# EAGLE board VentaConnected_Arduino_V0.01_2017-10-27 (EAGLE 8.3.2)
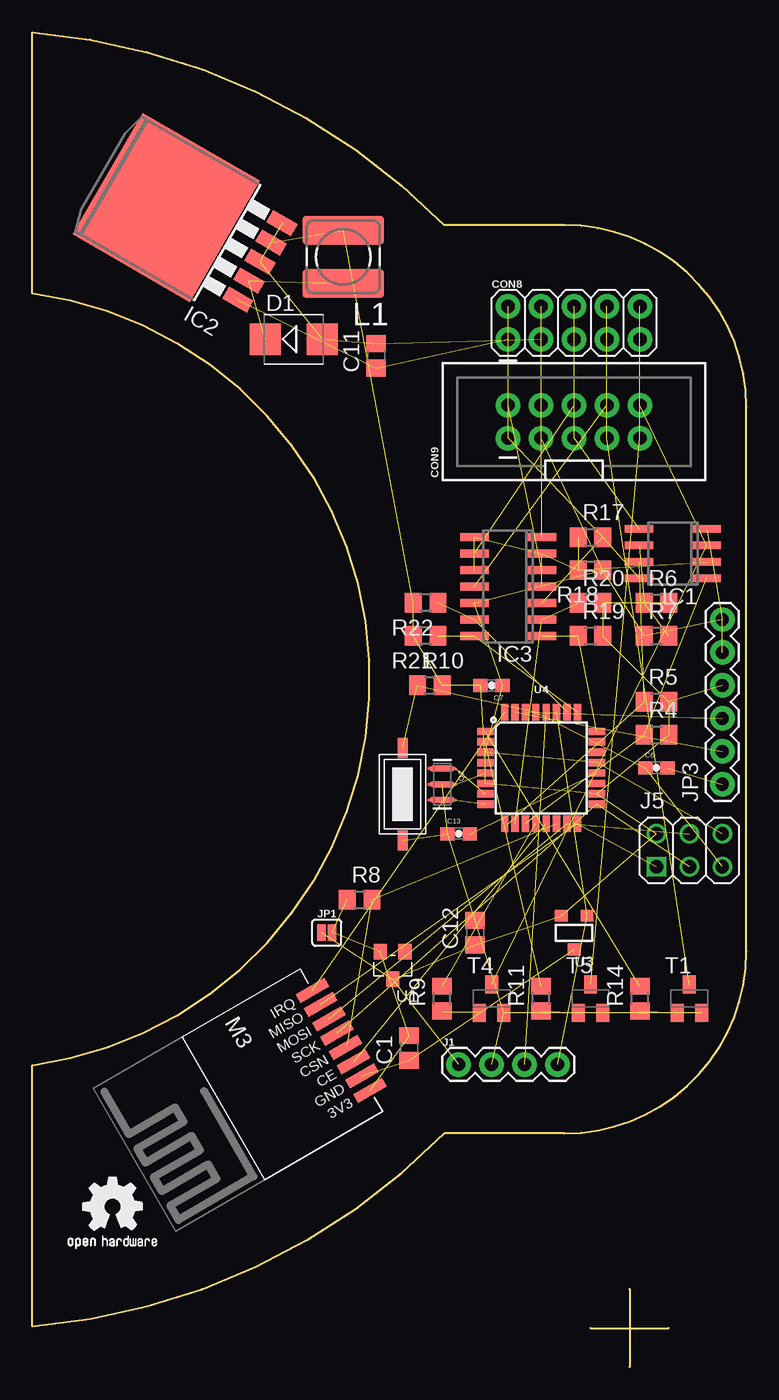
[diagram p0: board, top side]
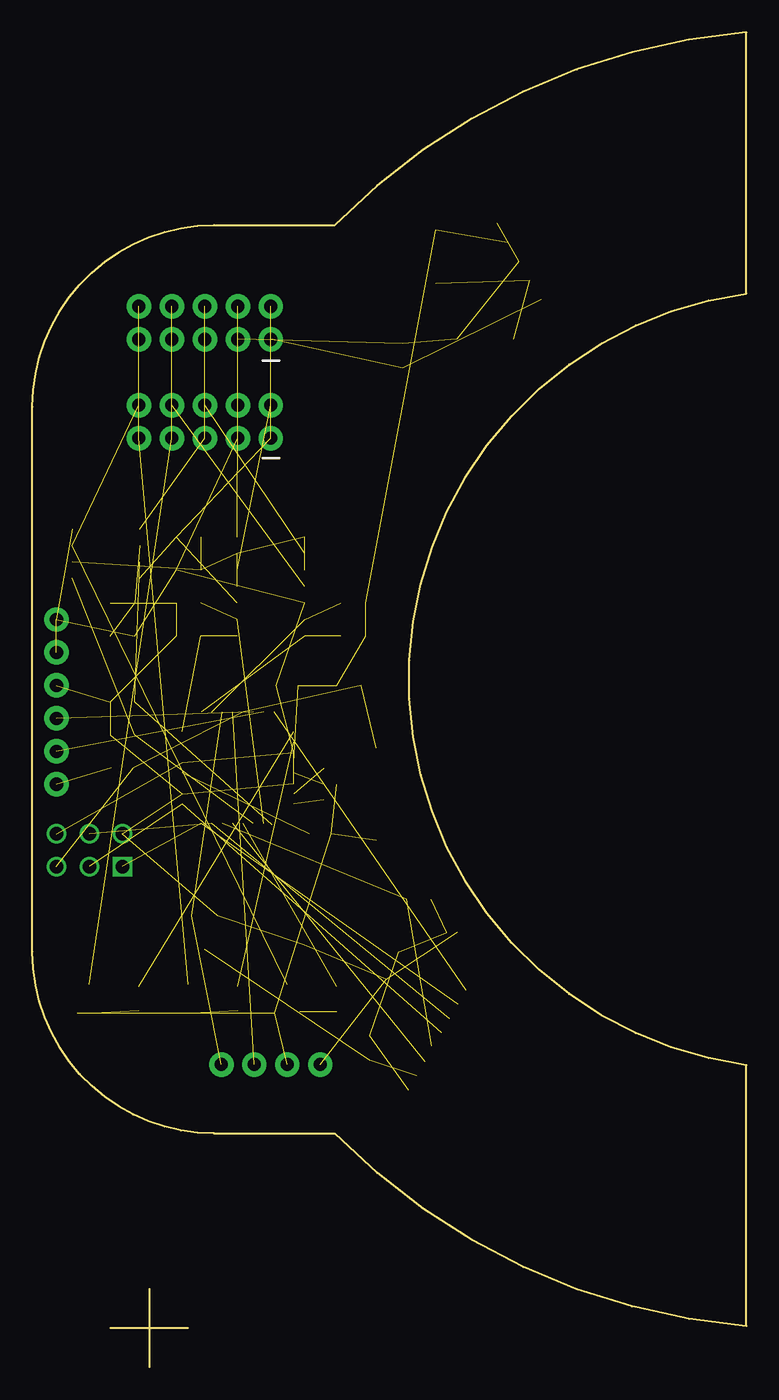
[diagram p1: board, bottom side, seen from below]

Size 55 x 102.85 mm. Coordinates in mm from the lower left corner, seen from the top.
Outline: 46,6 46,0
Outline: 43,3 49,3
Outline: 41,18 arc90 55,32 55,74 arc90 41,88 31.71,88 arc41 0,102.85 0,82.73 arc-165 0,23.27 0,3.16 arc41 31.71,18 41,18
Copper layers (1*16): Top 0.035mm / dielectric 1.5mm / Bottom 0.035mm
Design rules "default": minimum track width 6mil, minimum drill 0.35mm, track to track 6mil, track to pad 6mil, pad to pad 6mil, via to via 6mil, smd to smd 6mil, copper to edge 40mil, drill to drill 6mil, minimum pad ring 10mil, minimum via ring 8mil, stop-mask expansion 4mil, vias tented up to drill 0mil, thermal gap 10mil
Net classes: 0 default: width 0.203 mm; 1 vcc: width 0.254 mm

## Footprints (pad centres in the part's own frame; a part is rotated, then mirrored left to right if it is on the bottom)
SWITCH_SMD_PROMINI_RESET = smd 1.524 x 0.762: IN -0.508,1.778; OUT 6.604,1.778
C0805 = smd 1.3 x 1.5: 1 -0.95,0; 2 0.95,0
0603-CAP = smd 1.1 x 1: 1 -0.85,0; 2 0.85,0
2X5 = drill 1.016 pad 1.88: 1 0,0; 2 0,2.54; 3 2.54,0; 4 2.54,2.54; 5 5.08,0; 6 5.08,2.54; 7 7.62,0; 8 7.62,2.54; 9 10.16,0; 10 10.16,2.54
2X5-SHROUDED = drill 1.016 pad 1.88: 1 -1.27,5.08; 2 1.27,5.08; 3 -1.27,2.54; 4 1.27,2.54; 5 -1.27,0; 6 1.27,0; 7 -1.27,-2.54; 8 1.27,-2.54; 9 -1.27,-5.08; 10 1.27,-5.08
SMB = smd 2.4 x 2.4: A 2.2,0; C -2.2,0
SO08 = smd 0.6 x 2.2: 1 -1.905,-2.6; 2 -0.635,-2.6; 3 0.635,-2.6; 4 1.905,-2.6; 5 1.905,2.6; 6 0.635,2.6; 7 -0.635,2.6; 8 -1.905,2.6
TO263-5 = smd 1.067 x 2.159: 1 -3.404,-5.791; 2 -1.702,-5.791; 3 0,-5.791; 4 1.702,-5.791; 5 3.404,-5.791 | smd 10.8 x 10.41: 6 0,2.54
SO14 = smd 0.6 x 2.2: 1 -3.81,-2.6; 2 -2.54,-2.6; 3 -1.27,-2.6; 4 0,-2.6; 5 1.27,-2.6; 6 2.54,-2.6; 7 3.81,-2.6; 8 3.81,2.6; 9 2.54,2.6; 10 1.27,2.6; 11 0,2.6; 12 -1.27,2.6; 13 -2.54,2.6; 14 -3.81,2.6
1X04 = drill 1.016 pad 1.88: 1 0,0; 2 2.54,0; 3 5.08,0; 4 7.62,0
2X03 = drill 1.016 square: 1 -2.54,-1.27 | drill 1.016: 2 -2.54,1.27; 3 0,-1.27; 4 0,1.27; 5 2.54,-1.27; 6 2.54,1.27
SMT-JUMPER_2_NO_SILK = smd 0.635 x 1.27: 1 -0.406,0; 2 0.406,0
1X06 = drill 1.016 pad 1.88: 1 0,0; 2 2.54,0; 3 5.08,0; 4 7.62,0; 5 10.16,0; 6 12.7,0
POWER-CHOKE_WE-TPC = smd 6.3 x 2.2: 1 0,2.05; 2 0,-2.05
WIRELESS-NRF24L01-SMD = smd 2.54 x 0.762: 1 1.27,0; 2 1.27,1.27; 3 1.27,2.54; 4 1.27,3.81; 5 1.27,5.08; 6 1.27,6.35; 7 1.27,7.62; 8 1.27,8.89
RESONATOR-SMD-1:1 = smd 0.45 x 1.905: 1 -1.2,0; 2 0,0; 3 1.2,0
R0805 = smd 1.3 x 1.5: 1 -0.95,0; 2 0.95,0
SOT23-BEC = smd 1 x 1.4: B -0.95,-1.1; C 0,1.1; E 0.95,-1.1
SOT-23 = smd 1.016 x 1.2: 1 -0.95,-1.06; 2 0.95,-1.06; 3 0,1.06
SOT23-3 = smd 1 x 0.9: 1 -1,-1.3; 2 1,-1.3; 3 0,1.3
TQFP32-08 = smd 1.27 x 0.559: 1 -4.293,2.8; 2 -4.293,2; 3 -4.293,1.2; 4 -4.293,0.4; 5 -4.293,-0.4; 6 -4.293,-1.2; 7 -4.293,-2; 8 -4.293,-2.8; 17 4.293,-2.8; 18 4.293,-2; 19 4.293,-1.2; 20 4.293,-0.4; 21 4.293,0.4; 22 4.293,1.2; 23 4.293,2; 24 4.293,2.8 | smd 0.559 x 1.27: 9 -2.8,-4.293; 10 -2,-4.293; 11 -1.2,-4.293; 12 -0.4,-4.293; 13 0.4,-4.293; 14 1.2,-4.293; 15 2,-4.293; 16 2.8,-4.293; 25 2.8,4.293; 26 2,4.293; 27 1.2,4.293; 28 0.4,4.293; 29 -0.4,4.293; 30 -1.2,4.293; 31 -2,4.293; 32 -2.8,4.293

## Placement (x,y rotation side)
BT1  SWITCHPROMINI_RESET  [SWITCH_SMD_PROMINI_RESET]  30.29,41.1 90 top
C1  10uF  [C0805]  29.02,24.59 90 top
C6  0.1uF  [0603-CAP]  48.07,46.18 0 top
C7  0.1uF  [0603-CAP]  35.37,52.53 180 top
C11  100µF  [C0805]  26.48,77.93 90 top
C12  1000µF  [C0805]  34.1,33.48 90 top
C13  0.1uF  [0603-CAP]  32.83,41.1 0 top
CON8  Main Board  [2X5]  36.64,79.2 0 top
CON9  Panel  [2X5-SHROUDED]  41.72,72.85 90 top
D1  1N5822  [SMB]  20.13,79.2 0 top
GOLD_ORB_SM1  OSHWLOGO_GOLD_ORB_SM  [OSHW2]  2.35,8.08 0 top
IC1  LM393  [SO08]  49.34,62.69 90 top
IC2  LM2576  [TO263-5]  12.51,88.09 60 top
IC3  LM339  [SO14]  36.64,60.15 90 top
J1  I2C  [1X04]  32.83,23.32 0 top
J5  [2X03]  50.61,39.83 0 top
JP1  3.3V No regulator  [SMT-JUMPER_2_NO_SILK]  22.67,33.48 0 top
JP3  FTDI Basic  [1X06]  53.15,44.91 90 top
L1  100µH  [POWER-CHOKE_WE-TPC]  23.94,85.55 180 top
M3  NRF24L01+  [WIRELESS-NRF24L01-SMD]  22.67,29.67 210 top
Q2  8/16/20MHz  [RESONATOR-SMD-1:1]  31.56,44.91 270 top
R4  10k  [R0805]  48.07,48.72 0 top
R5  10k  [R0805]  48.07,51.26 0 top
R6  1M  [R0805]  48.07,58.88 0 top
R7  1M  [R0805]  48.07,56.34 0 top
R8  56k  [R0805]  25.21,36.02 0 top
R9  47k  [R0805]  31.56,28.4 90 top
R10  10K  [R0805]  30.61,52.53 0 top
R11  47k  [R0805]  39.18,28.4 90 top
R14  4,7k  [R0805]  46.8,28.4 90 top
R17  1M  [R0805]  42.99,63.96 0 top
R18  1M  [R0805]  42.99,61.42 180 top
R19  10k  [R0805]  42.99,56.34 0 top
R20  10k  [R0805]  42.99,58.88 0 top
R21  10k  [R0805]  30.29,56.34 180 top
R22  10k  [R0805]  30.29,58.88 180 top
T1  2N4401  [SOT23-BEC]  50.61,28.4 0 top
T4  2N4401  [SOT23-BEC]  35.37,28.4 0 top
T5  2N4401  [SOT23-BEC]  42.99,28.4 0 top
U1  XC6206P332MR  [SOT-23]  27.75,30.94 180 top
U3  ATSHA204A  [SOT23-3]  41.72,33.48 180 top
U4  ATMEGA328P_TQFP  [TQFP32-08]  39.18,46.18 0 top

## Library data of the parts
BT1 = NCA_Sensors
C1 C11 C12 L1 R4 R5 R8 R10 R19-R22 = rcl
C6 C7 C13 JP3 = SparkFun
CON8 = opentools-connectors; PROD_ID: CONN-08499; SF_ID: PRT-0778
CON9 = opentools-connectors; PROD_ID: CONN-08671; SF_ID: PRT-08506
D1 = diode
GOLD_ORB_SM1 = bfl
IC1 IC3 = linear
IC2 = national-semiconductor; MF: NATIONAL SEMICONDUCTOR; MPN: LM2596S-ADJ/NOPB; OC_FARNELL: 9494367; OC_NEWARK: 41K3842
J1 = SparkFun-Connectors; PROD_ID: CONN-09696
J5 = analyzer
JP1 = SparkFun-Jumpers
M3 = nrf24l01plus
Q2 = Testing
R6 R7 R9 R11 R14 R17 R18 = resistor
T1 T4 T5 = transistor-neu-to92
U1 = Seeed-IC; MPN: XC6206P332MR-G
U3 = TD-MySensors
U4 = SparkFun-IC-Microcontroller; PROD_ID: IC-09069

## Nets
A0: U4.23
A6: U4.19
A7: U4.22
AREF: C13.2 U4.20
BTN_OPEN: CON8.5 CON9.5 IC1.5
BTN_PWR: CON8.7 CON9.7 T1.C
BTN_UD: CON8.9 CON9.9 T5.C
D2: M3.1 U4.32
DTR: C6.2 JP3.1
GND: BT1.IN C7.1 C11.2 C12.2 C13.1 CON8.3 CON9.3 D1.A IC1.4 IC2.3 IC2.5 IC3.12 J1.2 J5.6 JP3.5 JP3.6 Q2.2 R7.1 R18.1 T1.E T4.E T5.E U4.3 U4.5 U4.21
GND_ARD: C1.1 M3.7 U3.3
LED_1: CON8.4 CON9.4 IC3.7
LED_2: CON8.6 CON9.6 IC3.9
LED_3: CON8.8 CON9.8 IC3.11
LED_ERR: CON8.10 CON9.10 IC1.3 T4.C
LED_ON: CON8.2 CON9.2 IC3.5
MISO: J5.1 M3.2 U4.16
MOSI: J5.4 M3.3 U4.15
N$1: D1.C IC2.2 L1.1
N$2: R14.1 T1.B
N$5: R9.1 T4.B
N$6: R11.1 T5.B
N$12: Q2.3 U4.8
N$13: Q2.1 U4.7
NRF_CE: M3.6 U4.13
NRF_CSN: M3.5 R8.2 U4.14
PIN_1: IC3.1 R19.1 U4.24
PIN_2: IC3.14 R21.1 U4.25
PIN_3: IC3.13 R22.1 U4.26
PIN_ERR: IC1.1 R4.1 U4.11
PIN_ERRLED: R9.2 U4.12
PIN_ON: IC3.2 R20.1 U4.10
PIN_OPEN: IC1.7 R5.1 U4.9
PIN_PWR: R14.2 U4.1
PIN_UD: R11.2 U4.2
RESET: BT1.OUT C6.1 J5.5 R10.1 U4.29
RXI: JP3.3 U4.30
SCK: J5.3 M3.4 U4.17
SCL: J1.3 U4.28
SDA: J1.4 U3.1 U4.27
TXO: JP3.2 U4.31
VCC_2.5V: IC1.6 R6.1 R7.2
VCC_3.3V: C1.2 JP1.2 M3.8 R8.1 U1.2
VCC_5V: C7.2 C12.1 IC2.4 J1.1 J5.2 JP1.1 JP3.4 L1.2 R4.2 R5.2 R6.2 R10.2 R19.2 R20.2 R21.2 R22.2 U1.3 U3.2 U4.4 U4.6 U4.18
VCC_12V: IC1.2 IC3.4 IC3.6 IC3.8 IC3.10 R17.1 R18.2
VCC_24V: C11.1 CON8.1 CON9.1 IC1.8 IC2.1 IC3.3 R17.2
VSS: U1.1

## Tracks (layer width: path | path; a pad name or v marks a point on that pad's centre or on a via)
AREF  (1 unrouted)
BTN_OPEN  (2 unrouted)
BTN_PWR  (2 unrouted)
BTN_UD  (2 unrouted)
D2  (1 unrouted)
DTR  (1 unrouted)
GND  (24 unrouted)
GND_ARD  (2 unrouted)
LED_1  (2 unrouted)
LED_2  (2 unrouted)
LED_3  (2 unrouted)
LED_ERR  (3 unrouted)
LED_ON  (2 unrouted)
MISO  (2 unrouted)
MOSI  (2 unrouted)
N$1  (2 unrouted)
N$2  (1 unrouted)
N$5  (1 unrouted)
  Top 0.203: 34.41,27.36 T4.B | 31.56,27.36 R9.1
N$6  (1 unrouted)
N$12  (1 unrouted)
N$13  (1 unrouted)
NRF_CE  (1 unrouted)
NRF_CSN  (2 unrouted)
  Top 0.152: 24.25,24.75 M3.5
PIN_1  (2 unrouted)
PIN_2  (2 unrouted)
PIN_3  (2 unrouted)
PIN_ERR  (2 unrouted)
PIN_ERRLED  (1 unrouted)
PIN_ON  (2 unrouted)
PIN_OPEN  (2 unrouted)
  Top 0.203: 36.54,41.23 36.54,41.76 U4.9
PIN_PWR  (1 unrouted)
PIN_UD  (1 unrouted)
RESET  (4 unrouted)
RXI  (1 unrouted)
SCK  (2 unrouted)
SCL  (1 unrouted)
SDA  (2 unrouted)
TXO  (1 unrouted)
VCC_2.5V  (2 unrouted)
VCC_3.3V  (4 unrouted)
VCC_5V  (20 unrouted)
VCC_12V  (6 unrouted)
VCC_24V  (6 unrouted)